# Altium PCB 01DriverOccure&SignalDetect.PcbDoc (part 3 of 3)
Units mil, origin at the board's own origin, x right, y up, seen from the top; angles counter-clockwise.
Board outline 5526.23 x 3781.16 mil, 2 copper layers (Top Layer, Bottom Layer); 144 components, 81 nets, 385 pads, 179 vias.
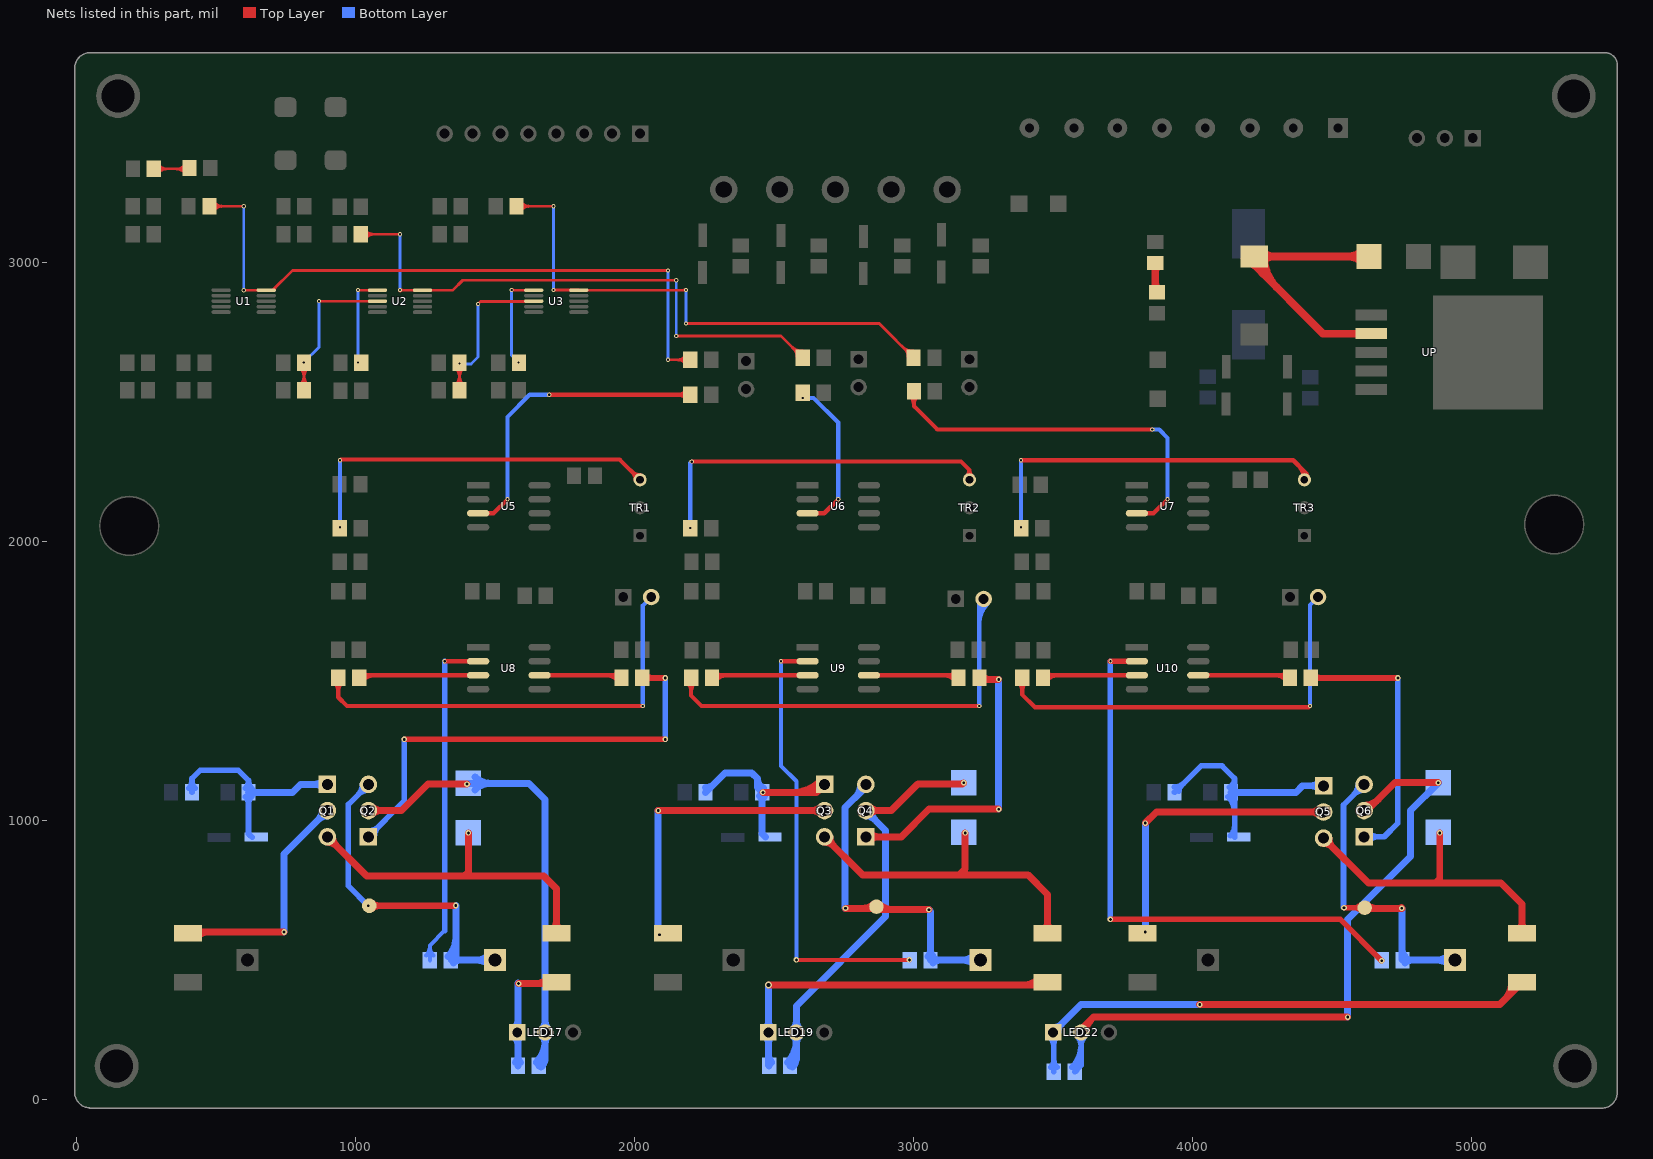
[diagram p3: the nets of this part, all layers, seen from the top]

## Via types
v1: diameter 15, hole 8, Top Layer to Bottom Layer, 110 vias
v2: diameter 20, hole 10, Top Layer to Bottom Layer, 51 vias
v3: diameter 12, hole 8, Top Layer to Bottom Layer, 7 vias
v4: diameter 25, hole 15, Top Layer to Bottom Layer, 5 vias
v5: diameter 30, hole 20, Top Layer to Bottom Layer, 3 vias
v6: diameter 35, hole 25, Top Layer to Bottom Layer, 3 vias

## Nets (pads, with @x,y where several pads share a name; then routed paths per layer and width w, separated by ;. In a path a pad name is that pad's centre, name@x,y a point inside that pad or via, vN(x,y) a via of type N, cw(c..) or ccw(c..) an arc to the next point about the centre after c; other vN are vias at no path point) (continued)
NetC105_2: C105.2 R10.1 U1.10 | length 2873.9
  Top Layer w10: C105.2@477.4,3200 v1(600,3200) ; v1(600,2899.37) U1.10@680.71,2899.37 704.37,2899.37 775,2970 v1(2120,2970) ; v1(2120,2650) R10.1@2200,2650 ; C105.2@491.96,3185.44 cw(c527.11,3150.29) 527.11,3200 ; C105.2@491.96,3185.44 cw(c527.11,3150.29) 527.11,3200 ; C105.2@491.96,3185.44 cw(c527.11,3150.29) 527.11,3200 ; C105.2@491.96,3214.56 ccw(c527.11,3249.71) 527.11,3200 ; C105.2@491.96,3214.56 ccw(c527.11,3249.71) 527.11,3200 ; C105.2@491.96,3214.56 ccw(c527.11,3249.71) 527.11,3200 ; U1.10@710.16,2899.37 cw(c724.13,2899.37) 714.25,2909.25 ; U1.10@710.16,2899.37 cw(c724.13,2899.37) 714.25,2909.25 ; U1.10@710.16,2899.37 cw(c724.13,2899.37) 714.25,2909.25 ; 2150.29,2650 ccw(c2150.29,2699.71) R10.1@2185.44,2664.56 ; 2150.29,2650 cw(c2150.29,2600.29) R10.1@2185.44,2635.44 ; 2150.29,2650 ccw(c2150.29,2699.71) R10.1@2185.44,2664.56 ; 2150.29,2650 cw(c2150.29,2600.29) R10.1@2185.44,2635.44 ; 2150.29,2650 ccw(c2150.29,2699.71) R10.1@2185.44,2664.56 ; 2150.29,2650 cw(c2150.29,2600.29) R10.1@2185.44,2635.44
  Bottom Layer w10: v1(600,2899.37) v1(600,3200) ; v1(2120,2650) v1(2120,2970)
NetC112_1: C112.1 U2.1 | length 328.7
  Top Layer w10: v1@1010.63,2899.37 U2.1@1079.29,2899.37
  Bottom Layer w10: v1(1010,2640) v1(1010,2900)
NetC113_1: C113.1 C114.1 U2.3 | length 1046.1
  Top Layer w10: C114.1@816.4,2540 C113.1@816.4,2640 ; v1(870,2860) U2.3@1079.29,2860 ; C114.1@801.84,2558.5 ccw(c766.69,2593.65) 816.4,2593.65 ; C114.1@801.84,2558.5 ccw(c766.69,2593.65) 816.4,2593.65 ; C114.1@801.84,2558.5 ccw(c766.69,2593.65) 816.4,2593.65 ; C113.1@801.84,2621.5 cw(c766.69,2586.35) 816.4,2586.35 ; C113.1@801.84,2621.5 cw(c766.69,2586.35) 816.4,2586.35 ; C113.1@801.84,2621.5 cw(c766.69,2586.35) 816.4,2586.35 ; C113.1@813.23,2638.23 cw(c805.58,2630.58) C113.1@816.4,2630.58 ; C113.1@813.23,2638.23 cw(c805.58,2630.58) C113.1@816.4,2630.58 ; C113.1@813.23,2638.23 cw(c805.58,2630.58) C113.1@816.4,2630.58 ; 816.4,2586.35 cw(c866.11,2586.35) C113.1@830.96,2621.5 ; 816.4,2586.35 cw(c866.11,2586.35) C113.1@830.96,2621.5 ; 816.4,2586.35 cw(c866.11,2586.35) C113.1@830.96,2621.5 ; 816.4,2593.65 ccw(c866.11,2593.65) C114.1@830.96,2558.5 ; 816.4,2593.65 ccw(c866.11,2593.65) C114.1@830.96,2558.5 ; 816.4,2593.65 ccw(c866.11,2593.65) C114.1@830.96,2558.5
  Bottom Layer w10: v1(815,2640) 870,2695 v1(870,2860)
NetC115_2: C115.2 R11.1 U2.10 | length 2670.1
  Top Layer w10: C115.2@1020.4,3100 v1(1160,3100) ; v1@1160.63,2899.37 U2.10@1240.71,2899.37 1349.37,2899.37 1385,2935 v1(2150,2935) ; v1(2150,2735) 2525,2735 R11.1@2603,2657 ; C115.2@1026.89,3091.51 cw(c1047.38,3071.02) 1047.38,3100 ; C115.2@1026.89,3091.51 cw(c1047.38,3071.02) 1047.38,3100 ; C115.2@1026.89,3091.51 cw(c1047.38,3071.02) 1047.38,3100 ; C115.2@1033.96,3084.44 cw(c1071.53,3046.88) 1071.53,3100 ; C115.2@1033.96,3084.44 cw(c1071.53,3046.88) 1071.53,3100 ; C115.2@1033.96,3084.44 cw(c1071.53,3046.88) 1071.53,3100 ; C115.2@1033.96,3113.56 ccw(c1066.7,3146.3) 1066.7,3100 ; C115.2@1033.96,3113.56 ccw(c1066.7,3146.3) 1066.7,3100 ; C115.2@1033.96,3113.56 ccw(c1066.7,3146.3) 1066.7,3100 ; v1@1161.77,2901.77 ccw(c1167.56,2907.56) 1167.56,2899.37 ; v1@1161.77,2901.77 ccw(c1167.56,2907.56) 1167.56,2899.37 ; v1@1161.77,2901.77 ccw(c1167.56,2907.56) 1167.56,2899.37 ; 2561.13,2698.87 ccw(c2603,2740.74) R11.1@2603,2681.53 ; 2561.13,2698.87 ccw(c2603,2740.74) R11.1@2603,2681.53 ; 2561.13,2698.87 ccw(c2603,2740.74) R11.1@2603,2681.53 ; 2570.63,2689.37 cw(c2542.2,2660.94) R11.1@2582.41,2660.94 ; 2570.63,2689.37 cw(c2542.2,2660.94) R11.1@2582.41,2660.94 ; 2570.63,2689.37 cw(c2542.2,2660.94) R11.1@2582.41,2660.94 ; R11.1@2578.2,2681.8 ccw(c2603,2706.6) R11.1@2603,2671.53 ; R11.1@2578.2,2681.8 ccw(c2603,2706.6) R11.1@2603,2671.53 ; R11.1@2578.2,2681.8 ccw(c2603,2706.6) R11.1@2603,2671.53
  Top Layer w15: C115.2@1019.4,3099 C115.2@1020.4,3100 ; v1(1160,2900) v1@1160.63,2899.37
  Bottom Layer w10: v1(1160,2900) v1(1160,3100) ; v1(2150,2735) v1(2150,2935)
NetC122_1: C122.1 U3.1 | length 369.2
  Top Layer w10: v1(1560,2900) 1560.63,2899.37 U3.1@1639.29,2899.37 ; v1@1561.77,2901.77 ccw(c1567.56,2907.56) 1567.56,2899.37 ; v1@1561.77,2901.77 ccw(c1567.56,2907.56) 1567.56,2899.37 ; v1@1561.77,2901.77 ccw(c1567.56,2907.56) 1567.56,2899.37
  Bottom Layer w10: v1(1560,2900) 1560,2665 v1(1585,2640)
NetC123_1: C123.1 C124.1 U3.3 | length 1066.6
  Top Layer w10: C124.1@1373.4,2540 C123.1@1373.4,2640 ; v1(1440,2850) 1449,2859 1638.29,2859 U3.3@1639.29,2860 ; C124.1@1358.84,2558.5 ccw(c1323.69,2593.65) 1373.4,2593.65 ; C124.1@1358.84,2558.5 ccw(c1323.69,2593.65) 1373.4,2593.65 ; C124.1@1358.84,2558.5 ccw(c1323.69,2593.65) 1373.4,2593.65 ; C123.1@1358.84,2621.5 cw(c1323.69,2586.35) 1373.4,2586.35 ; C123.1@1358.84,2621.5 cw(c1323.69,2586.35) 1373.4,2586.35 ; C123.1@1358.84,2621.5 cw(c1323.69,2586.35) 1373.4,2586.35 ; 1373.4,2586.35 cw(c1423.11,2586.35) C123.1@1387.96,2621.5 ; 1373.4,2586.35 cw(c1423.11,2586.35) C123.1@1387.96,2621.5 ; 1373.4,2586.35 cw(c1423.11,2586.35) C123.1@1387.96,2621.5 ; 1373.4,2593.65 ccw(c1423.11,2593.65) C124.1@1387.96,2558.5 ; 1373.4,2593.65 ccw(c1423.11,2593.65) C124.1@1387.96,2558.5 ; 1373.4,2593.65 ccw(c1423.11,2593.65) C124.1@1387.96,2558.5
  Bottom Layer w10: v1(1373.4,2636.6) 1375,2635 1415,2635 1440,2660 v1(1440,2850) ; v1@1375.17,2638.37 ccw(c1383.3,2646.49) 1383.3,2635 ; v1@1375.17,2638.37 ccw(c1383.3,2646.49) 1383.3,2635 ; v1@1375.17,2638.37 ccw(c1383.3,2646.49) 1383.3,2635
NetC125_2: C125.2 R12.1 U3.10 | length 2464.5
  Top Layer w10: C125.2@1577.4,3200 v1(1710,3200) ; v1(1710,2900) 1800.08,2900 U3.10@1800.71,2899.37 2184.37,2899.37 v1(2185,2900) ; v1(2185,2780) 2877,2780 R12.1@3000,2657 ; C125.2@1591.96,3185.44 cw(c1627.11,3150.29) 1627.11,3200 ; C125.2@1591.96,3185.44 cw(c1627.11,3150.29) 1627.11,3200 ; C125.2@1591.96,3185.44 cw(c1627.11,3150.29) 1627.11,3200 ; C125.2@1591.96,3214.56 ccw(c1627.11,3249.71) 1627.11,3200 ; C125.2@1591.96,3214.56 ccw(c1627.11,3249.71) 1627.11,3200 ; C125.2@1591.96,3214.56 ccw(c1627.11,3249.71) 1627.11,3200 ; 2177.44,2899.37 ccw(c2177.44,2907.56) v1@2183.23,2901.77 ; 2177.44,2899.37 ccw(c2177.44,2907.56) v1@2183.23,2901.77 ; 2177.44,2899.37 ccw(c2177.44,2907.56) v1@2183.23,2901.77 ; 2958.13,2698.87 ccw(c3000,2740.74) R12.1@3000,2681.53 ; 2958.13,2698.87 ccw(c3000,2740.74) R12.1@3000,2681.53 ; 2958.13,2698.87 ccw(c3000,2740.74) R12.1@3000,2681.53 ; 2967.63,2689.37 cw(c2939.2,2660.94) R12.1@2979.41,2660.94 ; 2967.63,2689.37 cw(c2939.2,2660.94) R12.1@2979.41,2660.94 ; 2967.63,2689.37 cw(c2939.2,2660.94) R12.1@2979.41,2660.94 ; R12.1@2975.2,2681.8 ccw(c3000,2706.6) R12.1@3000,2671.53 ; R12.1@2975.2,2681.8 ccw(c3000,2706.6) R12.1@3000,2671.53 ; R12.1@2975.2,2681.8 ccw(c3000,2706.6) R12.1@3000,2671.53
  Bottom Layer w10: v1(1710,2900) v1(1710,3200) ; v1(2185,2780) v1(2185,2900)
NetC300_1: C300.1 C301.1 Q1.1 R300.2 | length 1590.8
  Bottom Layer w20: R300.2@414.8,1100 414.8,1149.8 445,1180 580,1180 617.4,1142.6 C300.1@617.4,1100 617.4,952.6 C301.1@630,940 ; R300.2@403.78,1114.96 ccw(c377.17,1141.58) 414.8,1141.58 ; R300.2@403.78,1114.96 ccw(c377.17,1141.58) 414.8,1141.58 ; R300.2@403.78,1114.96 ccw(c377.17,1141.58) 414.8,1141.58 ; 414.8,1141.58 ccw(c452.44,1141.58) R300.2@425.83,1114.96 ; 414.8,1141.58 ccw(c452.44,1141.58) R300.2@425.83,1114.96 ; 414.8,1141.58 ccw(c452.44,1141.58) R300.2@425.83,1114.96 ; C300.1@606.38,1085.04 cw(c579.76,1058.42) 617.4,1058.42 ; C300.1@606.38,1085.04 cw(c579.76,1058.42) 617.4,1058.42 ; C300.1@606.38,1085.04 cw(c579.76,1058.42) 617.4,1058.42 ; C300.1@606.38,1114.96 ccw(c579.76,1141.58) 617.4,1141.58 ; C300.1@606.38,1114.96 ccw(c579.76,1141.58) 617.4,1141.58 ; C300.1@606.38,1114.96 ccw(c579.76,1141.58) 617.4,1141.58 ; 617.4,1058.42 cw(c655.04,1058.42) C300.1@628.43,1085.04 ; 617.4,1058.42 cw(c655.04,1058.42) C300.1@628.43,1085.04 ; 617.4,1058.42 cw(c655.04,1058.42) C300.1@628.43,1085.04 ; 617.4,1141.58 ccw(c655.04,1141.58) C300.1@628.43,1114.96 ; 617.4,1141.58 ccw(c655.04,1141.58) C300.1@628.43,1114.96 ; 617.4,1141.58 ccw(c655.04,1141.58) C300.1@628.43,1114.96 ; 617.4,958.72 ccw(c638.13,958.72) 623.47,944.06 cw(c638.13,958.72) 617.4,958.72
  Bottom Layer w25: C300.1@617.4,1100 775,1100 803.91,1128.91 Q1.1@900,1128.91 ; 649.01,1100 ccw(c649.01,1068.4) 626.66,1090.74 cw(c649.01,1068.4) 649.01,1100 ; 649.01,1100 cw(c649.01,1131.6) 626.66,1109.26 ccw(c649.01,1131.6) 649.01,1100 ; 854.14,1128.91 ccw(c854.14,1174.77) 886.57,1142.34 cw(c854.14,1174.77) 854.14,1128.91 ; 854.14,1128.91 cw(c854.14,1083.05) 886.57,1115.47 ccw(c854.14,1083.05) 854.14,1128.91
NetC304_1: C304.1 LED17.1 R303.1 | length 1172.4
  Top Layer w25: v2(1585,415) 1715,415 R303.1@1720,420 ; 1645.79,415 ccw(c1645.79,474.13) R303.1@1687.6,432.32 ; 1645.79,415 ccw(c1645.79,474.13) R303.1@1687.6,432.32 ; 1645.79,415 ccw(c1645.79,474.13) R303.1@1687.6,432.32 ; 1669.93,415 cw(c1669.93,390.01) R303.1@1687.6,407.68 ; 1669.93,415 cw(c1669.93,390.01) R303.1@1687.6,407.68 ; 1669.93,415 cw(c1669.93,390.01) R303.1@1687.6,407.68
  Bottom Layer w25: C304.1@1582.6,120 1582.6,417.4 v2(1585,415) ; LED17.1@1567.96,227.96 cw(c1532.62,192.62) 1582.6,192.62 ; LED17.1@1567.96,227.96 cw(c1532.62,192.62) 1582.6,192.62 ; LED17.1@1567.96,227.96 cw(c1532.62,192.62) 1582.6,192.62 ; LED17.1@1567.96,252.04 ccw(c1532.62,287.38) 1582.6,287.38 ; LED17.1@1567.96,252.04 ccw(c1532.62,287.38) 1582.6,287.38 ; LED17.1@1567.96,252.04 ccw(c1532.62,287.38) 1582.6,287.38 ; C304.1@1573.34,133.19 ccw(c1550.99,155.54) 1582.6,155.54 ; C304.1@1573.34,133.19 ccw(c1550.99,155.54) 1582.6,155.54 ; C304.1@1573.34,133.19 ccw(c1550.99,155.54) 1582.6,155.54 ; 1582.6,155.54 ccw(c1614.2,155.54) C304.1@1591.85,133.19 ; 1582.6,155.54 ccw(c1614.2,155.54) C304.1@1591.85,133.19 ; 1582.6,155.54 ccw(c1614.2,155.54) C304.1@1591.85,133.19 ; 1582.6,205.16 cw(c1614.84,205.16) LED17.1@1592.04,227.96 ; 1582.6,205.16 cw(c1614.84,205.16) LED17.1@1592.04,227.96 ; 1582.6,205.16 cw(c1614.84,205.16) LED17.1@1592.04,227.96 ; 1582.6,274.84 ccw(c1614.84,274.84) LED17.1@1592.04,252.04 ; 1582.6,274.84 ccw(c1614.84,274.84) LED17.1@1592.04,252.04 ; 1582.6,274.84 ccw(c1614.84,274.84) LED17.1@1592.04,252.04
NetC304_2: C304.2 D1.1 LED17.2 Q2.2 | length 2806
  Top Layer w25: Q2.2@1047,1035 1165,1035 1260,1130 v2(1400,1130) ; 1092.86,1035 ccw(c1092.86,989.14) 1060.43,1021.57 cw(c1092.86,989.14) 1092.86,1035 ; 1092.86,1035 cw(c1092.86,1080.86) 1060.43,1048.43 ccw(c1092.86,1080.86) 1092.86,1035
  Bottom Layer w25: D1.1@1405,1132.58 1622.42,1132.58 1680,1075 LED17.2@1680,240 1680,142.6 C304.2@1657.4,120 ; 1484.13,1132.58 ccw(c1484.13,1053.45) 1428.18,1109.41 cw(c1484.13,1053.45) 1484.13,1132.58 ; 1484.13,1132.58 cw(c1484.13,1211.71) 1428.18,1155.76 ccw(c1484.13,1211.71) 1484.13,1132.58 ; C304.2@1648.15,133.19 ccw(c1571.24,210.1) 1680,210.1 ; C304.2@1648.15,133.19 ccw(c1571.24,210.1) 1680,210.1 ; C304.2@1648.15,133.19 ccw(c1571.24,210.1) 1680,210.1 ; C304.2@1665.82,115.52 ccw(c1631.6,149.74) 1680,149.74 ; C304.2@1665.82,115.52 ccw(c1631.6,149.74) 1680,149.74 ; C304.2@1665.82,115.52 ccw(c1631.6,149.74) 1680,149.74 ; LED17.2@1667.96,227.96 cw(c1638.89,198.89) 1680,198.89 ; LED17.2@1667.96,227.96 cw(c1638.89,198.89) 1680,198.89 ; LED17.2@1667.96,227.96 cw(c1638.89,198.89) 1680,198.89 ; LED17.2@1667.96,252.04 ccw(c1638.89,281.11) 1680,281.11 ; LED17.2@1667.96,252.04 ccw(c1638.89,281.11) 1680,281.11 ; LED17.2@1667.96,252.04 ccw(c1638.89,281.11) 1680,281.11 ; 1680,198.89 cw(c1721.11,198.89) LED17.2@1692.04,227.96 ; 1680,198.89 cw(c1721.11,198.89) LED17.2@1692.04,227.96 ; 1680,198.89 cw(c1721.11,198.89) LED17.2@1692.04,227.96 ; 1680,281.11 ccw(c1721.11,281.11) LED17.2@1692.04,252.04 ; 1680,281.11 ccw(c1721.11,281.11) LED17.2@1692.04,252.04 ; 1680,281.11 ccw(c1721.11,281.11) LED17.2@1692.04,252.04
NetC310_1: C310.1 C312.1 Q3.1 R310.2 | length 1412.6
  Top Layer w25: v2(2460,1100) 2652.09,1100 Q3.1@2681,1128.91 ; 2565.36,1100 ccw(c2565.36,1244.55) 2667.57,1142.34 cw(c2565.36,1244.55) 2565.36,1100 ; 2625.71,1100 ccw(c2625.71,1184.2) 2685.25,1124.66 cw(c2625.71,1184.2) 2625.71,1100
  Bottom Layer w25: R310.2@2254.8,1100 2325,1170.2 2420.2,1170.2 2440.39,1150 ; C312.1@2470,940 2457.4,952.6 C310.1@2457.4,1100 2440.39,1117.01 2440.39,1150 ; R310.2@2254.8,1117.03 ccw(c2254.8,1158.14) 2283.87,1129.07 ; R310.2@2254.8,1117.03 ccw(c2254.8,1158.14) 2283.87,1129.07 ; R310.2@2254.8,1117.03 ccw(c2254.8,1158.14) 2283.87,1129.07 ; 2440.39,1150 ccw(c2477.59,1150) C310.1@2462.66,1115.93 ; 2440.39,1150 ccw(c2477.59,1150) C310.1@2462.66,1115.93 ; 2440.39,1150 ccw(c2477.59,1150) C310.1@2462.66,1115.93 ; C310.1@2448.15,1086.81 cw(c2425.8,1064.46) 2457.4,1064.46 ; C310.1@2448.15,1086.81 cw(c2425.8,1064.46) 2457.4,1064.46 ; C310.1@2448.15,1086.81 cw(c2425.8,1064.46) 2457.4,1064.46 ; 2457.4,1064.46 cw(c2489.01,1064.46) C310.1@2466.66,1086.81 ; 2457.4,1064.46 cw(c2489.01,1064.46) C310.1@2466.66,1086.81 ; 2457.4,1064.46 cw(c2489.01,1064.46) C310.1@2466.66,1086.81
NetC314_1: C314.1 LED19.1 R313.1 | length 1957.6
  Top Layer w25: v4(2480,410) 3470,410 R313.1@3480,420 ; 3393.72,410 ccw(c3393.72,486.2) R313.1@3447.6,432.32 ; 3393.72,410 ccw(c3393.72,486.2) R313.1@3447.6,432.32 ; 3393.72,410 ccw(c3393.72,486.2) R313.1@3447.6,432.32
  Bottom Layer w25: v4(2480,410) LED19.1@2480,240 2480,122.6 C314.1@2482.6,120 ; LED19.1@2467.96,227.96 cw(c2438.89,198.89) 2480,198.89 ; LED19.1@2467.96,227.96 cw(c2438.89,198.89) 2480,198.89 ; LED19.1@2467.96,227.96 cw(c2438.89,198.89) 2480,198.89 ; LED19.1@2467.96,252.04 ccw(c2438.89,281.11) 2480,281.11 ; LED19.1@2467.96,252.04 ccw(c2438.89,281.11) 2480,281.11 ; LED19.1@2467.96,252.04 ccw(c2438.89,281.11) 2480,281.11 ; 2480,161.81 ccw(c2520.47,161.81) C314.1@2491.85,133.19 ; 2480,161.81 ccw(c2520.47,161.81) C314.1@2491.85,133.19 ; 2480,161.81 ccw(c2520.47,161.81) C314.1@2491.85,133.19 ; 2480,198.89 cw(c2521.11,198.89) LED19.1@2492.04,227.96 ; 2480,198.89 cw(c2521.11,198.89) LED19.1@2492.04,227.96 ; 2480,198.89 cw(c2521.11,198.89) LED19.1@2492.04,227.96 ; 2480,281.11 ccw(c2521.11,281.11) LED19.1@2492.04,252.04 ; 2480,281.11 ccw(c2521.11,281.11) LED19.1@2492.04,252.04 ; 2480,281.11 ccw(c2521.11,281.11) LED19.1@2492.04,252.04
NetC314_2: C314.2 D2.1 LED19.2 Q4.2 | length 2459.5
  Top Layer w25: Q4.2@2829,1035 2920,1035 3015,1130 3175,1130 v2(3179.58,1134.58) ; 2874.86,1035 ccw(c2874.86,989.14) 2842.43,1021.57 cw(c2874.86,989.14) 2874.86,1035 ; 2874.86,1035 cw(c2874.86,1080.86) 2842.43,1048.43 ccw(c2874.86,1080.86) 2874.86,1035
  Bottom Layer w25: C314.2@2557.4,120 2580,142.6 LED19.2@2580,240 2580,335 2900,655 2900,964 Q4.2@2829,1035 ; C314.2@2548.15,133.19 ccw(c2471.24,210.1) 2580,210.1 ; C314.2@2548.15,133.19 ccw(c2471.24,210.1) 2580,210.1 ; C314.2@2548.15,133.19 ccw(c2471.24,210.1) 2580,210.1 ; C314.2@2565.82,115.52 ccw(c2531.6,149.74) 2580,149.74 ; C314.2@2565.82,115.52 ccw(c2531.6,149.74) 2580,149.74 ; C314.2@2565.82,115.52 ccw(c2531.6,149.74) 2580,149.74 ; LED19.2@2567.96,227.96 cw(c2538.89,198.89) 2580,198.89 ; LED19.2@2567.96,227.96 cw(c2538.89,198.89) 2580,198.89 ; LED19.2@2567.96,227.96 cw(c2538.89,198.89) 2580,198.89 ; 2580,198.89 cw(c2621.11,198.89) LED19.2@2592.04,227.96 ; 2580,198.89 cw(c2621.11,198.89) LED19.2@2592.04,227.96 ; 2580,198.89 cw(c2621.11,198.89) LED19.2@2592.04,227.96 ; 2580,281.11 ccw(c2621.11,281.11) 2592.04,252.04 cw(c2621.11,281.11) 2580,281.11 ; 2580,281.11 cw(c2538.89,281.11) 2567.96,252.04 ccw(c2538.89,281.11) 2580,281.11 ; 2861.43,1002.57 ccw(c2829,970.14) 2829,1016 cw(c2829,970.14) 2861.43,1002.57 ; 2861.43,1002.57 cw(c2893.86,1035) 2848,1035 ccw(c2893.86,1035) 2861.43,1002.57
NetC320_1: C320.1 C321.1 Q5.1 R320.2 | length 1511.4
  Bottom Layer w20: R320.2@3934.8,1100 3935,1100 4030,1195 4105,1195 4150,1150 ; C321.1@4150,940 4150,1087.4 4150,1100 4150,1150 ; R320.2@3934.8,1119.53 ccw(c3934.8,1167.14) 3968.47,1133.47 ; R320.2@3934.8,1119.53 ccw(c3934.8,1167.14) 3968.47,1133.47 ; R320.2@3934.8,1119.53 ccw(c3934.8,1167.14) 3968.47,1133.47 ; R320.2@3950.39,1103.94 cw(c3978.06,1103.94) R320.2@3958.5,1123.5 ; R320.2@3950.39,1103.94 cw(c3978.06,1103.94) R320.2@3958.5,1123.5 ; R320.2@3950.39,1103.94 cw(c3978.06,1103.94) R320.2@3958.5,1123.5 ; C320.1@4126.38,1085.04 cw(c4069.35,1028.01) 4150,1028.01 ; C320.1@4126.38,1085.04 cw(c4069.35,1028.01) 4150,1028.01 ; C320.1@4126.38,1085.04 cw(c4069.35,1028.01) 4150,1028.01 ; C320.1@4130.31,1117.82 ccw(c4113.86,1150) 4150,1150 ; C320.1@4130.31,1117.82 ccw(c4113.86,1150) 4150,1150 ; C320.1@4130.31,1117.82 ccw(c4113.86,1150) 4150,1150 ; C321.1@4135.34,944.06 ccw(c4099.96,979.44) 4150,979.44 cw(c4099.96,979.44) C321.1@4135.34,944.06
  Bottom Layer w25: C320.1@4137.4,1100 4150,1100 4370,1100 4393.91,1123.91 Q5.1@4469,1123.91 ; C320.1@4146.66,1090.74 cw(c4169.01,1068.4) 4169.01,1100 cw(c4169.01,1131.6) C320.1@4146.66,1109.26 ; Q5.1@4455.57,1110.47 ccw(c4423.14,1078.05) 4423.14,1123.91 ccw(c4423.14,1169.77) Q5.1@4455.57,1137.34
NetC323_1: C323.1 LED22.1 R323.1 | length 2702.2
  Top Layer w25: v2(4025,340) 5100,340 R323.1@5180,420 ; 5115.98,355.98 ccw(c5051.97,420) R323.1@5142.5,420 ; 5115.98,355.98 ccw(c5051.97,420) R323.1@5142.5,420 ; 5115.98,355.98 ccw(c5051.97,420) R323.1@5142.5,420
  Bottom Layer w20: LED22.1@3500,240 3502.6,237.4 C323.1@3502.6,100 ; LED22.1@3486.19,226.19 cw(c3446.58,186.58) 3502.6,186.58 ; LED22.1@3486.19,226.19 cw(c3446.58,186.58) 3502.6,186.58 ; LED22.1@3486.19,226.19 cw(c3446.58,186.58) 3502.6,186.58 ; C323.1@3491.57,114.96 ccw(c3464.96,141.58) 3502.6,141.58 ; C323.1@3491.57,114.96 ccw(c3464.96,141.58) 3502.6,141.58 ; C323.1@3491.57,114.96 ccw(c3464.96,141.58) 3502.6,141.58 ; 3502.6,141.58 ccw(c3540.24,141.58) C323.1@3513.62,114.96 ; 3502.6,141.58 ccw(c3540.24,141.58) C323.1@3513.62,114.96 ; 3502.6,141.58 ccw(c3540.24,141.58) C323.1@3513.62,114.96 ; 3502.6,199.13 cw(c3540.87,199.13) LED22.1@3513.81,226.19 ; 3502.6,199.13 cw(c3540.87,199.13) LED22.1@3513.81,226.19 ; 3502.6,199.13 cw(c3540.87,199.13) LED22.1@3513.81,226.19
  Bottom Layer w25: LED22.1@3500,240 3600,340 v2(4025,340) ; LED22.1@3500,257.03 ccw(c3500,298.14) LED22.1@3529.07,269.07 ; LED22.1@3500,257.03 ccw(c3500,298.14) LED22.1@3529.07,269.07 ; LED22.1@3500,257.03 ccw(c3500,298.14) LED22.1@3529.07,269.07 ; LED22.1@3517.03,240 cw(c3558.14,240) LED22.1@3529.07,269.07 ; LED22.1@3517.03,240 cw(c3558.14,240) LED22.1@3529.07,269.07 ; LED22.1@3517.03,240 cw(c3558.14,240) LED22.1@3529.07,269.07
NetC323_2: C323.2 D3.1 LED22.2 Q6.2 | length 3331
  Top Layer w25: LED22.2@3600,240 3600,250 3645,295 v2(4555,295) ; Q6.2@4614,1035 4625,1035 4725,1135 v2(4879.58,1135) ; LED22.2@3617.03,240 cw(c3682.28,240) 3636.14,286.14 ; LED22.2@3617.03,240 cw(c3682.28,240) 3636.14,286.14 ; LED22.2@3617.03,240 cw(c3682.28,240) 3636.14,286.14 ; Q6.2@4614,1054 ccw(c4614,1126.41) 4665.21,1075.21 cw(c4614,1126.41) Q6.2@4614,1054
  Bottom Layer w20: C323.2@3577.4,100 3600,122.6 LED22.2@3600,240 ; C323.2@3566.38,114.96 ccw(c3485.21,196.13) 3600,196.13 ; C323.2@3566.38,114.96 ccw(c3485.21,196.13) 3600,196.13 ; C323.2@3566.38,114.96 ccw(c3485.21,196.13) 3600,196.13 ; C323.2@3580.52,100.82 ccw(c3533.49,147.85) 3600,147.85 ; C323.2@3580.52,100.82 ccw(c3533.49,147.85) 3600,147.85 ; C323.2@3580.52,100.82 ccw(c3533.49,147.85) 3600,147.85 ; LED22.2@3586.19,226.19 cw(c3552.86,192.86) 3600,192.86 ; LED22.2@3586.19,226.19 cw(c3552.86,192.86) 3600,192.86 ; LED22.2@3586.19,226.19 cw(c3552.86,192.86) 3600,192.86 ; 3600,192.86 cw(c3647.14,192.86) LED22.2@3613.81,226.19 ; 3600,192.86 cw(c3647.14,192.86) LED22.2@3613.81,226.19 ; 3600,192.86 cw(c3647.14,192.86) LED22.2@3613.81,226.19
  Bottom Layer w25: v2(4555,295) 4555,645 4780,870 4780,1034.58 D3.1@4880,1134.58
NetD1_2: D1.2 Q1.3 R303.2 | length 1494.8
  Top Layer w25: Q1.3@900,940.91 1040.91,800 1390,800 ; v2(1405,955) 1405,815 1390,800 ; R303.2@1720,595 1720,755 1675,800 1390,800 ; 932.43,908.48 ccw(c900,876.05) 900,921.91 cw(c900,876.05) 932.43,908.48 ; 932.43,908.48 cw(c964.86,940.91) 919,940.91 ccw(c964.86,940.91) 932.43,908.48 ; 1720,637.06 ccw(c1762.06,637.06) 1732.32,607.32 cw(c1762.06,637.06) 1720,637.06 ; 1720,637.06 cw(c1677.94,637.06) 1707.68,607.32 ccw(c1677.94,637.06) 1720,637.06
  Bottom Layer w25: v2(1405,955) D1.2@1405,955.42
NetD2_2: D2.2 Q3.3 R313.2 | length 1453.8
  Top Layer w25: Q3.3@2681,940.91 2816.91,805 3165,805 ; v2(3185,955) 3185,825 3165,805 ; R313.2@3480,600 3480,735 3410,805 3165,805 ; 2713.43,908.48 ccw(c2681,876.05) 2681,921.91 cw(c2681,876.05) 2713.43,908.48 ; 2713.43,908.48 cw(c2745.86,940.91) 2700,940.91 ccw(c2745.86,940.91) 2713.43,908.48 ; 3480,637.06 ccw(c3522.06,637.06) 3492.32,607.32 cw(c3522.06,637.06) 3480,637.06 ; 3480,637.06 cw(c3437.94,637.06) 3467.68,607.32 ccw(c3437.94,637.06) 3480,637.06
NetD02_2: D02.2 L01.2 UP.2 | length 2193.2
  Top Layer w27.87: D02.2@4631.42,3020 L01.2@4220,3020 4220,2990 4466.5,2743.5 UP.2@4639.79,2743.5 ; L01.2@4227.4,3020 ccw(c4317.7,3020) 4253.85,2956.15 ; L01.2@4227.4,3020 ccw(c4317.7,3020) 4253.85,2956.15 ; L01.2@4227.4,3020 ccw(c4317.7,3020) 4253.85,2956.15 ; L01.2@4247.83,3002.02 cw(c4291.24,2958.6) 4291.24,3020 ; L01.2@4247.83,3002.02 cw(c4291.24,2958.6) 4291.24,3020 ; L01.2@4247.83,3002.02 cw(c4291.24,2958.6) 4291.24,3020 ; L01.2@4247.83,3037.98 ccw(c4291.24,3081.4) 4291.24,3020 ; L01.2@4247.83,3037.98 ccw(c4291.24,3081.4) 4291.24,3020 ; L01.2@4247.83,3037.98 ccw(c4291.24,3081.4) 4291.24,3020 ; L01.2@4255.28,3020 ccw(c4412.86,3020) 4301.43,2908.57 ; L01.2@4255.28,3020 ccw(c4412.86,3020) 4301.43,2908.57 ; L01.2@4255.28,3020 ccw(c4412.86,3020) 4301.43,2908.57 ; 4555.76,3020 ccw(c4555.76,3095.66) D02.2@4609.26,3042.16 ; 4555.76,3020 cw(c4555.76,2944.34) D02.2@4609.26,2997.84 ; 4555.76,3020 ccw(c4555.76,3095.66) D02.2@4609.26,3042.16 ; 4555.76,3020 cw(c4555.76,2944.34) D02.2@4609.26,2997.84 ; 4555.76,3020 ccw(c4555.76,3095.66) D02.2@4609.26,3042.16 ; 4555.76,3020 cw(c4555.76,2944.34) D02.2@4609.26,2997.84
NetD3_2: D3.2 Q5.3 R323.2 | length 1391.1
  Top Layer w25: Q5.3@4469,935.91 4629.91,775 4865,775 ; v2(4885,955) 4885,790 4870,775 4865,775 ; R323.2@5180,605 R323.2@5180,595 5180,700 5105,775 4865,775 ; 4501.43,903.48 ccw(c4469,871.05) 4469,916.91 cw(c4469,871.05) 4501.43,903.48 ; 4501.43,903.48 cw(c4533.86,935.91) 4488,935.91 ccw(c4533.86,935.91) 4501.43,903.48 ; 5180,637.06 ccw(c5222.06,637.06) 5192.32,607.32 cw(c5222.06,637.06) 5180,637.06 ; 5180,637.06 cw(c5137.94,637.06) 5167.68,607.32 ccw(c5137.94,637.06) 5180,637.06
NetDLED_1: DLED.1 R0.1.1 | length 665.1
  Top Layer w10: R0.1.1@278,3334 402.6,3334 DLED.1@405.6,3337 ; R0.1.1@292.56,3319.44 cw(c327.71,3284.29) 327.71,3334 ; R0.1.1@292.56,3319.44 cw(c327.71,3284.29) 327.71,3334 ; R0.1.1@292.56,3319.44 cw(c327.71,3284.29) 327.71,3334 ; R0.1.1@292.56,3348.56 ccw(c327.71,3383.71) 327.71,3334 ; R0.1.1@292.56,3348.56 ccw(c327.71,3383.71) 327.71,3334 ; R0.1.1@292.56,3348.56 ccw(c327.71,3383.71) 327.71,3334 ; 353.63,3334 cw(c353.63,3281.09) DLED.1@391.04,3318.5 ; 353.63,3334 cw(c353.63,3281.09) DLED.1@391.04,3318.5 ; 353.63,3334 cw(c353.63,3281.09) DLED.1@391.04,3318.5 ; 358.15,3334 ccw(c358.15,3380.51) DLED.1@391.04,3347.62 ; 358.15,3334 ccw(c358.15,3380.51) DLED.1@391.04,3347.62 ; 358.15,3334 ccw(c358.15,3380.51) DLED.1@391.04,3347.62 ; 377.77,3334 cw(c377.77,3305.23) DLED.1@398.11,3325.57 ; 377.77,3334 cw(c377.77,3305.23) DLED.1@398.11,3325.57 ; 377.77,3334 cw(c377.77,3305.23) DLED.1@398.11,3325.57
NetDQ_1: DQ.1 R0.0.1 | length 323.5
  Top Layer w27.87: R0.0.1@3866,2997 3866,2897.4 DQ.1@3872,2891.4 ; R0.0.1@3857.76,2988.76 cw(c3837.87,2968.87) 3866,2968.87 ; R0.0.1@3857.76,2988.76 cw(c3837.87,2968.87) 3866,2968.87 ; R0.0.1@3857.76,2988.76 cw(c3837.87,2968.87) 3866,2968.87 ; 3866,2924.52 ccw(c3901.18,2924.52) DQ.1@3876.3,2899.64 ; 3866,2924.52 ccw(c3901.18,2924.52) DQ.1@3876.3,2899.64 ; 3866,2924.52 ccw(c3901.18,2924.52) DQ.1@3876.3,2899.64 ; 3866,2968.87 cw(c3894.13,2968.87) R0.0.1@3874.24,2988.76 ; 3866,2968.87 cw(c3894.13,2968.87) R0.0.1@3874.24,2988.76 ; 3866,2968.87 cw(c3894.13,2968.87) R0.0.1@3874.24,2988.76
NetJR1_1: JR1.1 P3-1.0 Q2.3 R304.2 | length 2164
  Top Layer w20: P3-1.0@1040,704 P3-1.0@1050,694
  Top Layer w25: P3-1.0@1050,694 v2@1354,694 ; P3-1.0@1059.59,684.41 cw(c1082.74,661.26) 1082.74,694 ; P3-1.0@1059.59,684.41 cw(c1082.74,661.26) 1082.74,694 ; P3-1.0@1059.59,684.41 cw(c1082.74,661.26) 1082.74,694 ; P3-1.0@1059.59,703.59 ccw(c1082.74,726.74) 1082.74,694 ; P3-1.0@1059.59,703.59 ccw(c1082.74,726.74) 1082.74,694 ; P3-1.0@1059.59,703.59 ccw(c1082.74,726.74) 1082.74,694
  Bottom Layer w20: v2(1046,694) 975,765 975,1057.09 Q2.3@1047,1129.09 ; R304.2@1341.8,499 1370,499 R304.2@1360,509 ; JR1.1@1499,499 JR1.1@1500,500 ; 1010.3,1092.4 ccw(c973.61,1129.09) 1025.5,1129.09 cw(c973.61,1129.09) 1010.3,1092.4 ; 1010.3,1092.4 cw(c1047,1055.7) 1047,1107.6 ccw(c1047,1055.7) 1010.3,1092.4
  Bottom Layer w25: R304.2@1360,509 v2(1360,695) ; 1370,499 JR1.1@1499,499 ; R304.2@1332.55,512.19 ccw(c1266.27,578.47) 1360,578.47 ; R304.2@1332.55,512.19 ccw(c1266.27,578.47) 1360,578.47 ; R304.2@1332.55,512.19 ccw(c1266.27,578.47) 1360,578.47 ; R304.2@1351.06,489.74 cw(c1373.41,467.4) 1373.41,499 ; R304.2@1351.06,489.74 cw(c1373.41,467.4) 1373.41,499 ; R304.2@1351.06,489.74 cw(c1373.41,467.4) 1373.41,499 ; R304.2@1351.06,508.26 ccw(c1373.41,530.6) 1373.41,499 ; R304.2@1351.06,508.26 ccw(c1373.41,530.6) 1373.41,499 ; R304.2@1351.06,508.26 ccw(c1373.41,530.6) 1373.41,499 ; 1432.72,499 ccw(c1432.72,567.28) JR1.1@1481,519 ; 1432.72,499 ccw(c1432.72,567.28) JR1.1@1481,519 ; 1432.72,499 ccw(c1432.72,567.28) JR1.1@1481,519 ; 1437.54,499 cw(c1437.54,437.54) JR1.1@1481,481 ; 1437.54,499 cw(c1437.54,437.54) JR1.1@1481,481 ; 1437.54,499 cw(c1437.54,437.54) JR1.1@1481,481
NetJR2_1: JR2.1 P3-2.0 Q4.3 R312.2 | length 2115.8
  Top Layer w25: v2(2756,685) 2861,685 P3-2.0@2867,691 ; P3-2.0@2860,698 P3-2.0@2867,691 ; v2(3055,680) 2878,680 P3-2.0@2867,691 ; P3-2.0@2876.59,700.59 ccw(c2926.3,750.3) 2926.3,680 ; P3-2.0@2876.59,700.59 ccw(c2926.3,750.3) 2926.3,680 ; P3-2.0@2876.59,700.59 ccw(c2926.3,750.3) 2926.3,680 ; 2819.77,685 ccw(c2819.77,738.23) 2857.41,700.59 cw(c2819.77,738.23) 2819.77,685
  Bottom Layer w20: JR2.1@3239,499 JR2.1@3240,500
  Bottom Layer w25: v2(2756,685) 2755,686 2755,1045.37 2829,1119.37 Q4.3@2829,1129.09 ; v2(3055,680) 3060.8,674.2 R312.2@3060.8,499 JR2.1@3239,499 ; R312.2@3051.55,512.19 ccw(c3029.2,534.54) 3060.8,534.54 ; R312.2@3051.55,512.19 ccw(c3029.2,534.54) 3060.8,534.54 ; R312.2@3051.55,512.19 ccw(c3029.2,534.54) 3060.8,534.54 ; 3060.8,534.54 ccw(c3092.41,534.54) R312.2@3070.06,512.19 ; 3060.8,534.54 ccw(c3092.41,534.54) R312.2@3070.06,512.19 ; 3060.8,534.54 ccw(c3092.41,534.54) R312.2@3070.06,512.19 ; R312.2@3070.06,489.74 cw(c3092.41,467.4) 3092.41,499 ; R312.2@3070.06,489.74 cw(c3092.41,467.4) 3092.41,499 ; R312.2@3070.06,489.74 cw(c3092.41,467.4) 3092.41,499 ; R312.2@3070.06,508.26 ccw(c3092.41,530.6) 3092.41,499 ; R312.2@3070.06,508.26 ccw(c3092.41,530.6) 3092.41,499 ; R312.2@3070.06,508.26 ccw(c3092.41,530.6) 3092.41,499 ; 3172.72,499 ccw(c3172.72,567.28) JR2.1@3221,519 ; 3172.72,499 ccw(c3172.72,567.28) JR2.1@3221,519 ; 3172.72,499 ccw(c3172.72,567.28) JR2.1@3221,519 ; 3177.54,499 cw(c3177.54,437.54) JR2.1@3221,481 ; 3177.54,499 cw(c3177.54,437.54) JR2.1@3221,481 ; 3177.54,499 cw(c3177.54,437.54) JR2.1@3221,481 ; 2789.69,1080.06 ccw(c2740.66,1129.09) 2810,1129.09 cw(c2740.66,1129.09) 2789.69,1080.06
NetJR3_1: JR3.1 P3-3.0 Q6.3 R322.2 | length 1999.8
  Top Layer w20: v2(4542,687) P3-3.0@4616,687 ; 4577.22,687 ccw(c4577.22,725.78) 4604.64,698.36 cw(c4577.22,725.78) 4577.22,687 ; 4577.22,687 cw(c4577.22,648.22) 4604.64,675.64 ccw(c4577.22,648.22) 4577.22,687
  Top Layer w25: P3-3.0@4616,687 4618,685 v2(4749,685) v2@4747.76,688 ; P3-3.0@4625.59,677.41 cw(c4643.92,659.08) 4643.92,685 ccw(c4643.92,659.08) P3-3.0@4625.59,677.41 ; P3-3.0@4625.59,696.59 ccw(c4653.57,724.57) 4653.57,685 cw(c4653.57,724.57) P3-3.0@4625.59,696.59
  Bottom Layer w20: v2(4542,687) 4540,689 4540,1055.09 Q6.3@4614,1129.09 ; R322.2@4749,501.8 R322.2@4751.8,499 ; JR3.1@4939,499 JR3.1@4940,500 ; 4577.3,1092.4 ccw(c4540.61,1129.09) 4592.5,1129.09 cw(c4540.61,1129.09) 4577.3,1092.4 ; 4577.3,1092.4 cw(c4614,1055.7) 4614,1107.6 ccw(c4614,1055.7) 4577.3,1092.4
  Bottom Layer w25: R322.2@4749,501.8 v2(4749,685) ; R322.2@4751.8,499 JR3.1@4939,499 ; 4749,541.31 ccw(c4790.18,541.31) R322.2@4761.06,512.19 ; 4749,541.31 ccw(c4790.18,541.31) R322.2@4761.06,512.19 ; 4749,541.31 ccw(c4790.18,541.31) R322.2@4761.06,512.19 ; R322.2@4761.06,489.74 cw(c4783.41,467.4) 4783.41,499 ; R322.2@4761.06,489.74 cw(c4783.41,467.4) 4783.41,499 ; R322.2@4761.06,489.74 cw(c4783.41,467.4) 4783.41,499 ; R322.2@4761.06,508.26 ccw(c4783.41,530.6) 4783.41,499 ; R322.2@4761.06,508.26 ccw(c4783.41,530.6) 4783.41,499 ; R322.2@4761.06,508.26 ccw(c4783.41,530.6) 4783.41,499 ; 4872.72,499 ccw(c4872.72,567.28) JR3.1@4921,519 ; 4872.72,499 ccw(c4872.72,567.28) JR3.1@4921,519 ; 4872.72,499 ccw(c4872.72,567.28) JR3.1@4921,519 ; 4877.54,499 cw(c4877.54,437.54) JR3.1@4921,481 ; 4877.54,499 cw(c4877.54,437.54) JR3.1@4921,481 ; 4877.54,499 cw(c4877.54,437.54) JR3.1@4921,481
NetQ1_2: Q1.2 R301.2 | length 1198
  Top Layer w20: R301.2@400,595 R301.2@405,600 ; R301.2@434.17,580.91 cw(c480.24,534.83) 480.24,600 ; R301.2@434.17,609.09 ccw(c456.1,631.02) 456.1,600
  Top Layer w25: R301.2@405,600 v2(745,600) ; R301.2@432.4,582.68 cw(c474.21,540.87) 474.21,600 ccw(c474.21,540.87) R301.2@432.4,582.68 ; R301.2@432.4,607.32 ccw(c450.07,624.99) 450.07,600 cw(c450.07,624.99) R301.2@432.4,607.32
  Bottom Layer w25: v2(745,600) 745,880 Q1.2@900,1035 ; 867.57,1002.57 ccw(c835.14,1035) 881,1035 cw(c835.14,1035) 867.57,1002.57 ; 867.57,1002.57 cw(c900,970.14) 900,1016 ccw(c900,970.14) 867.57,1002.57
NetQ2_1: Q2.1 R306.1 | length 1979.7
  Top Layer w20: v2(1175,1290) v2(2110,1290) ; R306.1@2028,1511 2029,1510 v2(2110,1510) ; R306.1@2039.02,1499.98 cw(c2063.22,1475.78) 2063.22,1510 ; R306.1@2039.02,1499.98 cw(c2063.22,1475.78) 2063.22,1510 ; R306.1@2039.02,1499.98 cw(c2063.22,1475.78) 2063.22,1510 ; R306.1@2039.02,1522.02 ccw(c2068.05,1551.05) 2068.05,1510 ; R306.1@2039.02,1522.02 ccw(c2068.05,1551.05) 2068.05,1510 ; R306.1@2039.02,1522.02 ccw(c2068.05,1551.05) 2068.05,1510
  Bottom Layer w20: Q2.1@1047,941.09 1175,1069.09 v2(1175,1290) ; v2(2110,1290) v2(2110,1510) ; 1083.7,977.79 ccw(c1120.39,941.09) 1068.5,941.09 cw(c1120.39,941.09) 1083.7,977.79 ; 1083.7,977.79 cw(c1047,1014.49) 1047,962.59 ccw(c1047,1014.49) 1083.7,977.79
NetQ3_2: Q3.2 R311.2 | length 1215.1
  Top Layer w25: v2(2085,1035) Q3.2@2684,1035 ; v2(2090,590) R311.2@2115,590 ; 2635.14,1035 ccw(c2635.14,1080.86) 2667.57,1048.43 cw(c2635.14,1080.86) 2635.14,1035 ; 2635.14,1035 cw(c2635.14,989.14) 2667.57,1021.57 ccw(c2635.14,989.14) 2635.14,1035
  Bottom Layer w25: v2(2085,1035) 2085,595 v2(2090,590)
NetQ4_1: Q4.1 R315.1 | length 1346.5
  Top Layer w25: Q4.1@2829,941.09 2956.09,941.09 3055,1040 v2(3305,1040) ; R315.1@3236,1511 3242,1505 v2(3305,1505) ; 2874.86,941.09 ccw(c2874.86,895.23) 2842.43,927.66 cw(c2874.86,895.23) 2874.86,941.09 ; 2874.86,941.09 cw(c2874.86,986.95) 2842.43,954.53 ccw(c2874.86,986.95) 2874.86,941.09 ; R315.1@3245.26,1497.81 cw(c3262.62,1480.44) 3262.62,1505 ; R315.1@3245.26,1497.81 cw(c3262.62,1480.44) 3262.62,1505 ; R315.1@3245.26,1497.81 cw(c3262.62,1480.44) 3262.62,1505 ; R315.1@3245.26,1516.32 ccw(c3272.58,1543.65) 3272.58,1505 ; R315.1@3245.26,1516.32 ccw(c3272.58,1543.65) 3272.58,1505 ; R315.1@3245.26,1516.32 ccw(c3272.58,1543.65) 3272.58,1505
  Bottom Layer w25: v2(3305,1040) v2(3305,1505)
NetQ5_2: Q5.2 R321.2 | length 1199.6
  Top Layer w25: v2(3830,990) 3870,1030 Q5.2@4479,1030 ; 4423.14,1030 ccw(c4423.14,1075.86) 4455.57,1043.43 cw(c4423.14,1075.86) 4423.14,1030 ; 4423.14,1030 cw(c4423.14,984.14) 4455.57,1016.57 ccw(c4423.14,984.14) 4423.14,1030
  Bottom Layer w25: v2(3830,600) 3830,750 v2(3830,990)
NetQ6_1: Q6.1 R325.1 | length 1314.1
  Top Layer w20: R325.1@4423,1511 4424,1510 v2(4735,1510) ; R325.1@4434.02,1499.98 cw(c4458.22,1475.78) 4458.22,1510 ; R325.1@4434.02,1499.98 cw(c4458.22,1475.78) 4458.22,1510 ; R325.1@4434.02,1499.98 cw(c4458.22,1475.78) 4458.22,1510 ; R325.1@4434.02,1522.02 ccw(c4463.05,1551.05) 4463.05,1510 ; R325.1@4434.02,1522.02 ccw(c4463.05,1551.05) 4463.05,1510 ; R325.1@4434.02,1522.02 ccw(c4463.05,1551.05) 4463.05,1510
  Bottom Layer w20: Q6.1@4614,941.09 4686.09,941.09 4735,990 v2(4735,1510) ; 4665.9,941.09 ccw(c4665.9,889.2) 4629.2,925.89 cw(c4665.9,889.2) 4665.9,941.09 ; 4665.9,941.09 cw(c4665.9,992.99) 4629.2,956.29 ccw(c4665.9,992.99) 4665.9,941.09
NetR200_2: R200.2 TR1.3 | length 1554.6
  Top Layer w15: TR1.3@2020,2220 1946.97,2293.03 947.49,2293.03 945,2290.54 v1(945,2290) ; v1(945,2290) cw(c952.31,2282.69) 952.31,2293.03 ; v1(945,2290) cw(c952.31,2282.69) 952.31,2293.03 ; v1(945,2290) cw(c952.31,2282.69) 952.31,2293.03 ; 1992.48,2247.52 ccw(c2020,2275.04) TR1.3@2020,2236.12 ; 1992.48,2247.52 cw(c1964.96,2220) TR1.3@2003.88,2220 ; 1992.48,2247.52 ccw(c2020,2275.04) TR1.3@2020,2236.12 ; 1992.48,2247.52 cw(c1964.96,2220) TR1.3@2003.88,2220 ; 1992.48,2247.52 ccw(c2020,2275.04) TR1.3@2020,2236.12 ; 1992.48,2247.52 cw(c1964.96,2220) TR1.3@2003.88,2220
  Bottom Layer w15: v1(945,2050) v1(945,2290)
NetR202_2: R202.2 U5.3 | length 1314.9
  Top Layer w15: U5.3@1440,2100 1495,2100 v1(1545,2150) ; v1(1695,2525) R202.2@2200.2,2525 ; 2156.52,2525 ccw(c2156.52,2568.67) R202.2@2187.4,2537.79 ; 2156.52,2525 cw(c2156.52,2481.33) R202.2@2187.4,2512.21 ; 2156.52,2525 ccw(c2156.52,2568.67) R202.2@2187.4,2537.79 ; 2156.52,2525 cw(c2156.52,2481.33) R202.2@2187.4,2512.21 ; 2156.52,2525 ccw(c2156.52,2568.67) R202.2@2187.4,2537.79 ; 2156.52,2525 cw(c2156.52,2481.33) R202.2@2187.4,2512.21
  Bottom Layer w15: v1(1545,2150) 1545,2445 1625,2525 v1(1695,2525)
NetR210_2: R210.2 TR2.3 | length 1477.8
  Top Layer w15: v1(2200,2047.2) R210.2@2200.2,2047 ; v1(2205,2285) 3170,2285 3200,2255 ; TR2.3@3200,2220 3200,2255 ; TR2.3@3189.52,2232.25 ccw(c3170.07,2255) 3200,2255 ; TR2.3@3189.52,2232.25 ccw(c3170.07,2255) 3200,2255 ; TR2.3@3189.52,2232.25 ccw(c3170.07,2255) 3200,2255 ; 3200,2255 ccw(c3229.93,2255) TR2.3@3210.48,2232.25 ; 3200,2255 ccw(c3229.93,2255) TR2.3@3210.48,2232.25 ; 3200,2255 ccw(c3229.93,2255) TR2.3@3210.48,2232.25
  Bottom Layer w15: v1(2200,2047.2) 2200,2280 v1(2205,2285) ; 2200,2272.93 cw(c2217.07,2272.93) v1(2205,2285) ; 2200,2272.93 cw(c2217.07,2272.93) v1(2205,2285) ; 2200,2272.93 cw(c2217.07,2272.93) v1(2205,2285)
NetR212_2: R212.2 U6.3 | length 587.9
  Top Layer w15: v1(2603.2,2513.2) R212.2@2603.2,2532 ; U6.3@2620,2100 2680,2100 v1(2730,2150)
  Bottom Layer w15: v1(2603.2,2513.2) 2641.8,2513.2 2730,2425 v1(2730,2150)
NetR220_2: R220.2 TR3.3 | length 1687.8
  Top Layer w15: v1(3385,2290) 4360,2290 4400,2250 ; TR3.3@4400,2220 4400,2250 ; 4376.87,2273.13 cw(c4323.74,2220) TR3.3@4398.88,2220 ; 4376.87,2273.13 cw(c4323.74,2220) TR3.3@4398.88,2220 ; 4376.87,2273.13 cw(c4323.74,2220) TR3.3@4398.88,2220 ; TR3.3@4391.1,2233.45 ccw(c4380.15,2250) 4400,2250 ; TR3.3@4391.1,2233.45 ccw(c4380.15,2250) 4400,2250 ; TR3.3@4391.1,2233.45 ccw(c4380.15,2250) 4400,2250 ; 4400,2250 ccw(c4419.85,2250) TR3.3@4408.9,2233.45 ; 4400,2250 ccw(c4419.85,2250) TR3.3@4408.9,2233.45 ; 4400,2250 ccw(c4419.85,2250) TR3.3@4408.9,2233.45 ; 4402.48,2247.52 cw(c4374.96,2220) TR3.3@4413.88,2220 ; 4402.48,2247.52 cw(c4374.96,2220) TR3.3@4413.88,2220 ; 4402.48,2247.52 cw(c4374.96,2220) TR3.3@4413.88,2220
  Bottom Layer w15: v1(3385,2050) v1(3385,2290)
NetR222_2: R222.2 U7.3 | length 1566.7
  Top Layer w15: R222.2@3001.2,2538 3001.2,2483.8 3085,2400 v1(3855,2400) ; U7.3@3800,2100 3860,2100 v1(3910,2150) ; R222.2@2988.4,2521.27 cw(c2957.52,2490.39) 3001.2,2490.39 ; R222.2@2988.4,2521.27 cw(c2957.52,2490.39) 3001.2,2490.39 ; R222.2@2988.4,2521.27 cw(c2957.52,2490.39) 3001.2,2490.39 ; 3001.2,2490.39 cw(c3044.87,2490.39) R222.2@3013.99,2521.27 ; 3001.2,2490.39 cw(c3044.87,2490.39) R222.2@3013.99,2521.27 ; 3001.2,2490.39 cw(c3044.87,2490.39) R222.2@3013.99,2521.27
  Bottom Layer w15: v1(3855,2400) 3880,2400 3910,2370 v1(3910,2150)
NetR304_1: R304.1 U8.2 | length 1418.8
  Top Layer w15: v1(1320,1570) U8.2@1440,1570
  Bottom Layer w15: R304.1@1267,499 1267,552 1320,605 ; R304.1@1254.21,515.73 ccw(c1223.33,546.61) 1267,546.61 ; R304.1@1254.21,515.73 ccw(c1223.33,546.61) 1267,546.61 ; R304.1@1254.21,515.73 ccw(c1223.33,546.61) 1267,546.61 ; 1267,546.61 ccw(c1310.67,546.61) R304.1@1279.79,515.73 ; 1267,546.61 ccw(c1310.67,546.61) R304.1@1279.79,515.73 ; 1267,546.61 ccw(c1310.67,546.61) R304.1@1279.79,515.73
  Bottom Layer w20: 1320,605 v1(1320,1570)
NetR305_2: R305.2 U8.3 | length 635.7
  Top Layer w15: R305.2@1013.8,1511 1022.8,1520 U8.3@1440,1520 ; R305.2@1026.6,1502.15 cw(c1069.7,1459.04) 1069.7,1520 ; R305.2@1026.6,1502.15 cw(c1069.7,1459.04) 1069.7,1520 ; R305.2@1026.6,1502.15 cw(c1069.7,1459.04) 1069.7,1520 ; R305.2@1026.6,1527.73 ccw(c1045.26,1546.39) 1045.26,1520 ; R305.2@1026.6,1527.73 ccw(c1045.26,1546.39) 1045.26,1520 ; R305.2@1026.6,1527.73 ccw(c1045.26,1546.39) 1045.26,1520
NetR306_2: R306.2 U8.6 | length 502.7
  Top Layer w15: U8.6@1660,1520 1944.2,1520 R306.2@1953.2,1511 ; 1897.3,1520 cw(c1897.3,1459.04) R306.2@1940.4,1502.15 ; 1897.3,1520 cw(c1897.3,1459.04) R306.2@1940.4,1502.15 ; 1897.3,1520 cw(c1897.3,1459.04) R306.2@1940.4,1502.15 ; 1921.74,1520 ccw(c1921.74,1546.39) R306.2@1940.4,1527.73 ; 1921.74,1520 ccw(c1921.74,1546.39) R306.2@1940.4,1527.73 ; 1921.74,1520 ccw(c1921.74,1546.39) R306.2@1940.4,1527.73
NetR312_1: R312.1 U9.2 | length 1592.8
  Top Layer w15: v1(2525,1570) U9.2@2620,1570 ; v2(2580,500) v2(2985,500)
  Bottom Layer w15: v1(2525,1570) 2525,1195 2580,1140 v2(2580,500)
NetR314_2: R314.2 U9.3 | length 551.7
  Top Layer w15: R314.2@2277.8,1511 2286.8,1520 U9.3@2620,1520 ; R314.2@2290.6,1502.15 cw(c2333.7,1459.04) 2333.7,1520 ; R314.2@2290.6,1502.15 cw(c2333.7,1459.04) 2333.7,1520 ; R314.2@2290.6,1502.15 cw(c2333.7,1459.04) 2333.7,1520 ; R314.2@2290.6,1527.73 ccw(c2309.26,1546.39) 2309.26,1520 ; R314.2@2290.6,1527.73 ccw(c2309.26,1546.39) 2309.26,1520 ; R314.2@2290.6,1527.73 ccw(c2309.26,1546.39) 2309.26,1520
NetR315_2: R315.2 U9.6 | length 530.7
  Top Layer w15: U9.6@2840,1520 3152.2,1520 R315.2@3161.2,1511 ; 3105.3,1520 cw(c3105.3,1459.04) R315.2@3148.4,1502.15 ; 3105.3,1520 cw(c3105.3,1459.04) R315.2@3148.4,1502.15 ; 3105.3,1520 cw(c3105.3,1459.04) R315.2@3148.4,1502.15 ; 3129.74,1520 ccw(c3129.74,1546.39) R315.2@3148.4,1527.73 ; 3129.74,1520 ccw(c3129.74,1546.39) R315.2@3148.4,1527.73 ; 3129.74,1520 ccw(c3129.74,1546.39) R315.2@3148.4,1527.73
NetR322_1: R322.1 U10.2 | length 2055.3
  Top Layer w20: v2(3705,645) 4529,645 v2(4677,497) ; v1(3705,1570) U10.2@3800,1570
  Bottom Layer w20: v2(3705,645) v1(3705,1570) ; v2(4677,497) R322.1@4677,499
NetR324_2: R324.2 U10.3 | length 545.7
  Top Layer w15: R324.2@3463.8,1511 3472.8,1520 U10.3@3800,1520 ; R324.2@3476.6,1502.15 cw(c3519.7,1459.04) 3519.7,1520 ; R324.2@3476.6,1502.15 cw(c3519.7,1459.04) 3519.7,1520 ; R324.2@3476.6,1502.15 cw(c3519.7,1459.04) 3519.7,1520 ; R324.2@3476.6,1527.73 ccw(c3495.26,1546.39) 3495.26,1520 ; R324.2@3476.6,1527.73 ccw(c3495.26,1546.39) 3495.26,1520 ; R324.2@3476.6,1527.73 ccw(c3495.26,1546.39) 3495.26,1520
NetR325_2: R325.2 U10.6 | length 537.7
  Top Layer w15: U10.6@4020,1520 4339.2,1520 R325.2@4348.2,1511 ; 4292.3,1520 cw(c4292.3,1459.04) R325.2@4335.4,1502.15 ; 4292.3,1520 cw(c4292.3,1459.04) R325.2@4335.4,1502.15 ; 4292.3,1520 cw(c4292.3,1459.04) R325.2@4335.4,1502.15 ; 4316.74,1520 ccw(c4316.74,1546.39) R325.2@4335.4,1527.73 ; 4316.74,1520 ccw(c4316.74,1546.39) R325.2@4335.4,1527.73 ; 4316.74,1520 ccw(c4316.74,1546.39) R325.2@4335.4,1527.73
SOUR_IN1: P20.2 R305.1 | length 1782.1
  Top Layer w15: R305.1@939,1511 939,1441 970,1410 v1(2030,1410) ; R305.1@926.21,1494.27 cw(c895.33,1463.39) 939,1463.39 ; R305.1@926.21,1494.27 cw(c895.33,1463.39) 939,1463.39 ; R305.1@926.21,1494.27 cw(c895.33,1463.39) 939,1463.39 ; 939,1463.39 cw(c982.67,1463.39) R305.1@951.79,1494.27 ; 939,1463.39 cw(c982.67,1463.39) R305.1@951.79,1494.27 ; 939,1463.39 cw(c982.67,1463.39) R305.1@951.79,1494.27
  Bottom Layer w15: v1(2030,1410) 2030,1770 P20.2@2060,1800
SOUR_IN2: P21.2 R314.1 | length 2129.5
  Top Layer w15: R314.1@2203,1511 2203,1447 2240,1410 v1(3235,1410) ; R314.1@2190.21,1494.27 cw(c2159.33,1463.39) 2203,1463.39 ; R314.1@2190.21,1494.27 cw(c2159.33,1463.39) 2203,1463.39 ; R314.1@2190.21,1494.27 cw(c2159.33,1463.39) 2203,1463.39 ; 2203,1463.39 cw(c2246.67,1463.39) R314.1@2215.79,1494.27 ; 2203,1463.39 cw(c2246.67,1463.39) R314.1@2215.79,1494.27 ; 2203,1463.39 cw(c2246.67,1463.39) R314.1@2215.79,1494.27
  Bottom Layer w15: v1(3235,1410) 3235,1777 P21.2@3251,1793 ; 3235,1701.19 cw(c3342.81,1701.19) P21.2@3266.58,1777.42 ; 3235,1701.19 cw(c3342.81,1701.19) P21.2@3266.58,1777.42 ; 3235,1701.19 cw(c3342.81,1701.19) P21.2@3266.58,1777.42 ; 3235,1737.41 cw(c3306.59,1737.41) P21.2@3255.97,1788.03 ; 3235,1737.41 cw(c3306.59,1737.41) P21.2@3255.97,1788.03 ; 3235,1737.41 cw(c3306.59,1737.41) P21.2@3255.97,1788.03
SOUR_IN3: P23.2 R324.1 | length 1760.2
  Top Layer w15: R324.1@3389,1511 3389,1451 3435,1405 4415,1405 v1(4420,1410) ; R324.1@3376.21,1494.27 cw(c3345.33,1463.39) 3389,1463.39 ; R324.1@3376.21,1494.27 cw(c3345.33,1463.39) 3389,1463.39 ; R324.1@3376.21,1494.27 cw(c3345.33,1463.39) 3389,1463.39 ; 3389,1463.39 cw(c3432.67,1463.39) R324.1@3401.79,1494.27 ; 3389,1463.39 cw(c3432.67,1463.39) R324.1@3401.79,1494.27 ; 3389,1463.39 cw(c3432.67,1463.39) R324.1@3401.79,1494.27 ; 4407.93,1405 ccw(c4407.93,1422.07) v1(4420,1410) ; 4407.93,1405 ccw(c4407.93,1422.07) v1(4420,1410) ; 4407.93,1405 ccw(c4407.93,1422.07) v1(4420,1410)
  Bottom Layer w15: v1(4420,1410) 4420,1771 P23.2@4449,1800
pads on no net: POWER-OUT.8 U4.1 U5.1 U5.5 U5.8 U6.1 U6.5 U6.8 U7.1 U7.5 U7.8 U8.1 U8.5 U8.8 U9.1 U9.5 U9.8 U10.1 U10.5 U10.8 UP.6

## Polygon pours and split planes (outlines as drawn)
AGND on Top Layer "Top Layer-r" (hatched 90Degree grid 20 track 11, remove dead copper, pour order 1000): 85,3680 5420,3680 5420,65 80,65 75,70 75,3670 85,3680
AGND on Bottom Layer "Top Layer-b" (hatched 90Degree grid 20 track 10, remove dead copper, pour order 1000): 85,3670 5430,3670 5430,60 70,60 70,3665 75,3670

## Keep-outs
Keep-Out Layer:
  lines w10: -0.25,3695 cw(c50,3695) 45,3745 5476.71,3745 cw(c5476.71,3705.57) 5515.95,3709.49 5515.25,23.87 cw(c5465,23.87) 5470,-26.13 50,-26.13 ; 0,3694.75 0,20.25 ccw(c50,25.25) 50,-25

## Other copper
Top Layer:
  text "NEU" at 4750,1950 h180

## Silkscreen, mask and mechanical layers (free items; w line width, h text height)
Top Overlay:
  lines w10: 3180,3265 3195,3265 3237.5,3307.5 ; 5360,110 5370,120
  text "AGND" at 3795,3735 h65 r180
  text "AV3.3" at 4110,3730 h65 r180
  text "AV-12" at 4440.12,3730 h65 r180
  text "DGND" at 3630,3690 h65 r180
  text "DV3.3" at 3950,3685 h65 r180
  text "AV5.0" at 4270,3685 h65 r180
  text "AV+12" at 4610,3685 h65 r180
  text "1" at 2105,3560 h80 r180
  text "1" at 4645,3515 h90 r180
  text "AGND" at 3255,3400 h65 r270
  text "AGND" at 4845,3400 h65 r180
  text "+12v" at 5050,3395 h65 r180
  text "1" at 2180,3270 h80 r180
  text "1" at 3270,2640 h90
  text "1" at 2870,2635 h90
  text "1" at 2465,2620 h90
  text "近红外水分仪" at 4605,1795 h135
  text "1" at 1860,1770 h90
  text "1" at 4250,1770 h90
  text "1" at 3050,1765 h90
  text "激励板" at 4760,1655 h130
  text ".LYK" at 5115,1650 h100
  text "激励信号输出" at 565,135 h130